# EAGLE board light-switch (EAGLE 9.2.2)
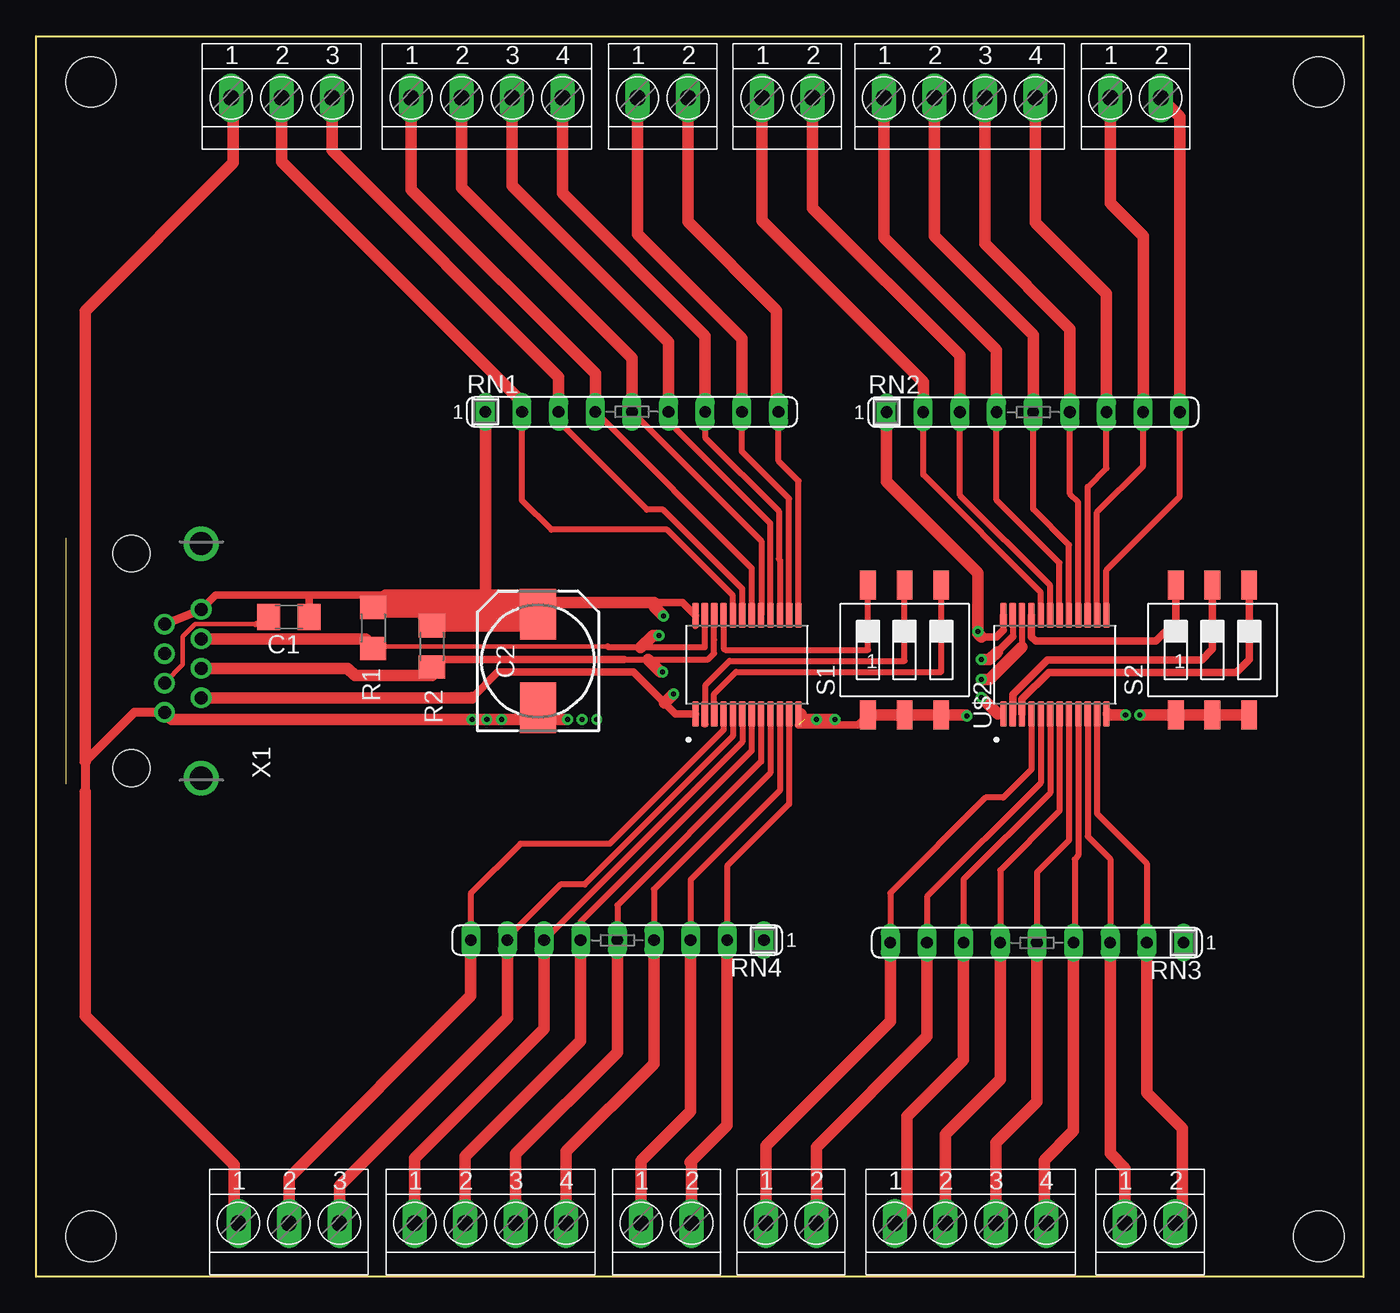
[diagram p0: board, top side]
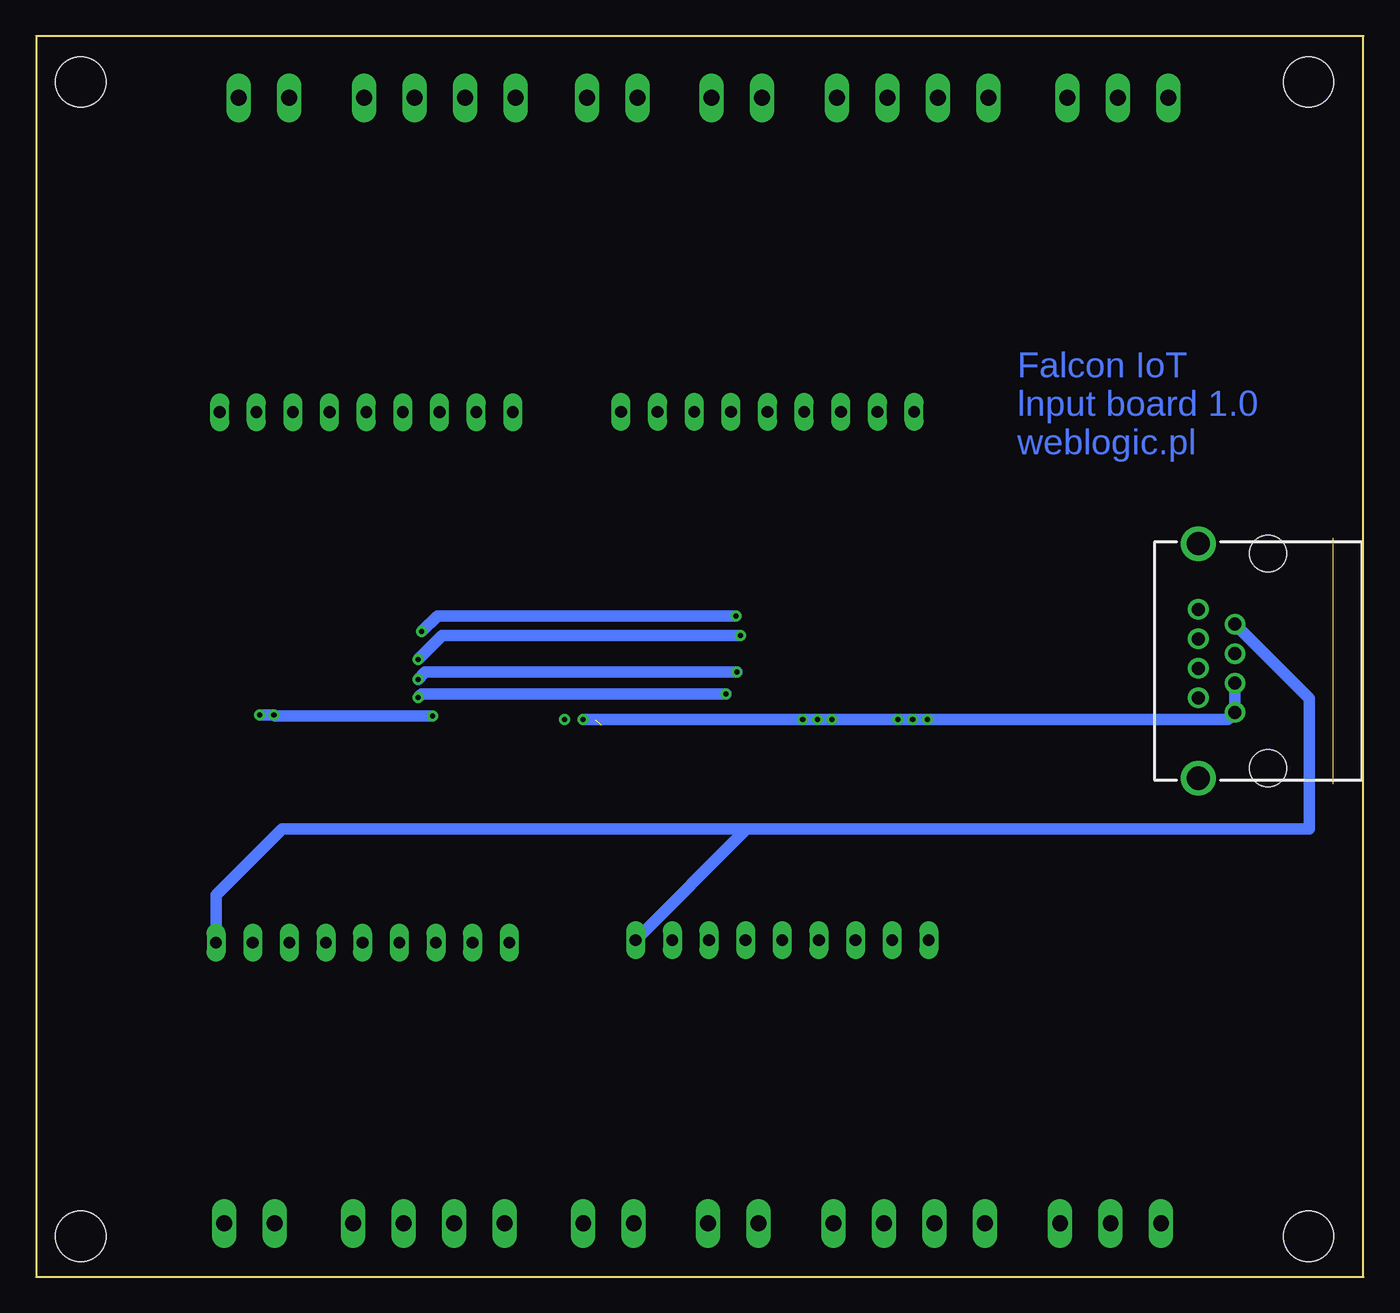
[diagram p1: board, bottom side, seen from below]

Size 92 x 86 mm. Coordinates in mm from the lower left corner, seen from the top.
Outline: 0,0 0,86 92,86 92,0 0,0
Copper layers (1*16): Top 0.035mm / dielectric 1.5mm / Bottom 0.035mm
Design rules "default": minimum track width 6mil, minimum drill 0.35mm, track to track 6mil, track to pad 6mil, pad to pad 6mil, via to via 6mil, smd to smd 6mil, copper to edge 40mil, drill to drill 6mil, minimum pad ring 10mil, minimum via ring 8mil, stop-mask expansion 4mil, vias tented up to drill 0mil, thermal gap 10mil
Holes 3.48 mm at 3.81,82.82 88.9,82.82 88.9,2.81 3.81,2.81

## Footprints (pad centres in the part's own frame; a part is rotated, then mirrored left to right if it is on the bottom)
C1206 = smd 1.6 x 1.8: 1 -1.4,0; 2 1.4,0
150CLZ-0810 = smd 3.5 x 2.5: + 3.25,0; - -3.25,0
R1206 = smd 1.6 x 1.803: 1 -1.422,0; 2 1.422,0
SIL9 = drill 0.813 long: 1 -10.16,0; 2 -7.62,0; 3 -5.08,0; 4 -2.54,0; 5 0,0; 6 2.54,0; 7 5.08,0; 8 7.62,0; 9 10.16,0
SMS-003 = smd 1.092 x 2.007: 1 -2.54,-4.496; 2 0,-4.496; 3 2.54,-4.496; 4 2.54,4.496; 5 0,4.496; 6 -2.54,4.496
SOP65P775X200-24N = smd 1.78 x 0.48: 1 -3.42,3.575; 2 -3.42,2.925; 3 -3.42,2.275; 4 -3.42,1.625; 5 -3.42,0.975; 6 -3.42,0.325; 7 -3.42,-0.325; 8 -3.42,-0.975; 9 -3.42,-1.625; 10 -3.42,-2.275; 11 -3.42,-2.925; 12 -3.42,-3.575; 13 3.42,-3.575; 14 3.42,-2.925; 15 3.42,-2.275; 16 3.42,-1.625; 17 3.42,-0.975; 18 3.42,-0.325; 19 3.42,0.325; 20 3.42,0.975; 21 3.42,1.625; 22 3.42,2.275; 23 3.42,2.925; 24 3.42,3.575
GLX-S-88M = drill 0.9 pad 1.422: 1 -3.57,-2.3; 2 -2.55,-4.84; 3 -1.53,-2.3; 4 -0.51,-4.84; 5 0.51,-2.3; 6 1.53,-4.84; 7 2.55,-2.3; 8 3.57,-4.84 | drill 1.6 pad 2.184: S1 -8.125,-4.84; S2 8.125,-4.84 | hole 2.55: -7.44,0; 7.44,0
TERMINAL-BLOCK-3-PIN-3.5MM-LONG-PAD = drill 1.1 pad 1.7 long: 1 -3.5,-0.1; 2 0,-0.1; 3 3.5,-0.1
TERMINAL-BLOCK-4-PIN-3.5MM-LONG-PAD = drill 1.1 pad 1.7 long: 1 -5.25,-0.1; 2 -1.75,-0.1; 3 1.75,-0.1; 4 5.25,-0.1
TERMINAL-BLOCK-2-PIN-3.5MM-LONG-PAD = drill 1.1 pad 1.7 long: 1 -1.75,-0.1; 2 1.75,-0.1

## Placement (x,y rotation side)
C1  [C1206]  17.53,45.74 0 top
C2  [150CLZ-0810]  34.8,42.69 90 top
R1  [R1206]  23.37,44.97 90 top
R2  [R1206]  27.43,43.7 90 top
RN1  [SIL9]  41.3,59.96 0 top
RN2  [SIL9]  69.11,59.93 0 top
RN3  [SIL9]  69.37,23.16 180 top
RN4  [SIL9]  40.28,23.33 180 top
S1  SWS003  [SMS-003]  60.2,43.45 0 top
S2  SWS003  [SMS-003]  81.53,43.45 0 top
U$1  PCF8575CSSOP24  [SOP65P775X200-24N]  49.28,42.43 90 top
U$2  PCF8575CSSOP24  [SOP65P775X200-24N]  70.61,42.43 90 top
X1  GLX-S-88M  [GLX-S-88M]  6.6,42.69 90 top
X2  TERMINAL-BLOCK-3.5MM-3-PIN-LONG-PAD  [TERMINAL-BLOCK-3-PIN-3.5MM-LONG-PAD]  17.53,3.81 0 top
X3  TERMINAL-BLOCK-3.5MM-3-PIN-LONG-PAD  [TERMINAL-BLOCK-3-PIN-3.5MM-LONG-PAD]  17.02,81.82 0 top
X4  TERMINAL-BLOCK-3.5MM-4-PIN-LONG-PAD  [TERMINAL-BLOCK-4-PIN-3.5MM-LONG-PAD]  31.24,81.82 0 top
X5  TERMINAL-BLOCK-3.5MM-2-PIN-LONG-PAD  [TERMINAL-BLOCK-2-PIN-3.5MM-LONG-PAD]  43.43,81.82 0 top
X6  TERMINAL-BLOCK-3.5MM-4-PIN-LONG-PAD  [TERMINAL-BLOCK-4-PIN-3.5MM-LONG-PAD]  31.5,3.81 0 top
X7  TERMINAL-BLOCK-3.5MM-2-PIN-LONG-PAD  [TERMINAL-BLOCK-2-PIN-3.5MM-LONG-PAD]  43.69,3.81 0 top
X8  TERMINAL-BLOCK-3.5MM-2-PIN-LONG-PAD  [TERMINAL-BLOCK-2-PIN-3.5MM-LONG-PAD]  52.07,81.82 0 top
X9  TERMINAL-BLOCK-3.5MM-2-PIN-LONG-PAD  [TERMINAL-BLOCK-2-PIN-3.5MM-LONG-PAD]  52.32,3.81 0 top
X10  TERMINAL-BLOCK-3.5MM-4-PIN-LONG-PAD  [TERMINAL-BLOCK-4-PIN-3.5MM-LONG-PAD]  64.01,81.82 0 top
X11  TERMINAL-BLOCK-3.5MM-4-PIN-LONG-PAD  [TERMINAL-BLOCK-4-PIN-3.5MM-LONG-PAD]  64.77,3.81 0 top
X12  TERMINAL-BLOCK-3.5MM-2-PIN-LONG-PAD  [TERMINAL-BLOCK-2-PIN-3.5MM-LONG-PAD]  76.2,81.82 0 top
X13  TERMINAL-BLOCK-3.5MM-2-PIN-LONG-PAD  [TERMINAL-BLOCK-2-PIN-3.5MM-LONG-PAD]  77.22,3.81 0 top

## Library data of the parts
C1 = eagle-ltspice; SPICEMODEL: NONE; SPICEPREFIX: C
C2 = rcl; SPICEPREFIX: C
R1 R2 = eagle-ltspice; SPICEMODEL: NONE; SPICEPREFIX: R
RN1-RN4 = resistor-sil; OC_FARNELL: unknown; OC_NEWARK: unknown
S1 S2 = smd-special
U$1 U$2 = pcf8575c
X1 = con-kycon; OC_FARNELL: unknown; OC_NEWARK: unknown
X2-X13 = Rembrandt Electronics - Terminal Block 3-5mm v1-0

## Nets
GND: C1.1 C2.- S1.1 S1.2 S1.3 S2.1 S2.2 S2.3 U$1.12 U$2.12 X1.1 X1.3 X2.1 X3.1
INT: U$1.1 U$2.1 X1.2
N$1: RN1.2 U$1.20 X3.2
N$3: RN1.3 U$1.19 X3.3
N$4: RN1.4 U$1.18 X4.1
N$5: RN1.5 U$1.17 X4.2
N$6: RN1.6 U$1.16 X4.3
N$7: RN1.7 U$1.15 X4.4
N$8: RN1.8 U$1.14 X5.1
N$9: RN1.9 U$1.13 X5.2
N$10: RN4.9 U$1.4 X2.2
N$11: RN4.8 U$1.5 X2.3
N$12: RN4.7 U$1.6 X6.1
N$13: RN4.6 U$1.7 X6.2
N$14: RN4.5 U$1.8 X6.3
N$15: RN4.4 U$1.9 X6.4
N$16: RN4.3 U$1.10 X7.1
N$17: RN4.2 U$1.11 X7.2
N$19: RN3.9 U$2.4 X9.1
N$20: S1.4 U$1.3
N$26: S2.5 U$2.2
N$27: S1.6 U$1.21
N$28: S1.5 U$1.2
N$29: S2.4 U$2.3
N$30: RN2.2 U$2.20 X8.1
N$31: RN2.3 U$2.19 X8.2
N$32: RN2.4 U$2.18 X10.1
N$33: RN2.5 U$2.17 X10.2
N$34: RN2.6 U$2.16 X10.3
N$35: RN2.7 U$2.15 X10.4
N$36: RN2.8 U$2.14 X12.1
N$37: RN2.9 U$2.13 X12.2
N$39: RN3.8 U$2.5 X9.2
N$40: RN3.7 U$2.6 X11.1
N$41: RN3.6 U$2.7 X11.2
N$42: RN3.5 U$2.8 X11.3
N$43: RN3.4 U$2.9 X11.4
N$44: RN3.3 U$2.10 X13.1
N$45: RN3.2 U$2.11 X13.2
N$46: S2.6 U$2.21
SCL: R2.1 U$1.22 U$2.22 X1.4
SDA: R1.1 U$1.23 U$2.23 X1.6
VDD: C1.2 C2.+ R1.2 R2.2 RN1.1 RN2.1 RN3.1 RN4.1 U$1.24 U$2.24 X1.7 X1.8

## Tracks (layer width: path | path; a pad name or v marks a point on that pad's centre or on a via)
GND  (via drill 0.35)  (1 unrouted)
  Top 0.305: S1.2 S1.3 | X1.3 10.17,42.43 10.17,44.38 11.02,45.23 15.21,45.23 15.52,45.23 16.15,45.86
  Top 0.406: U$2.12 74.25,38.95 v75.51,38.95 | 53.24,38.62 v55.37,38.62 | C1.1 15.62,45.23 15.21,45.23 | U$1.12 53,38.87
  Top 0.508: 57.33,38.62 S1.1 56.96,38.25 52.85,38.25
  Top 0.61: 3.4,33.61 3.4,35.72 6.8,39.12 X1.1
  Top 0.813: S1.1 S1.3 64.44,38.95 v64.52,38.88 | X1.1 9.4,38.62 v30.23,38.62 v31.24,38.62 v32.26,38.62 34.8,38.62 | 34.8,38.62 C2.- | 53,39.01 53,38.87 53.24,38.62 v54.1,38.62 v55.37,38.62 | v36.83,38.62 34.8,38.62 | S2.3 S2.2 S2.1 v76.5,38.95 | v75.51,38.95 74.4,38.95 74.34,39.01 | 3.4,33.61 3.4,18.07 13.72,7.76 13.72,4.02 X2.1 | 3.4,35.72 3.4,66.95 13.66,77.21 13.66,81.57 X3.1
  Bottom 0.813: X1.3 X1.1 9.4,38.62 v30.23,38.62 v31.24,38.62 v32.26,38.62 v36.83,38.62 v37.85,38.62 v38.86,38.62 v54.1,38.62 | v64.52,38.88 75.44,38.88 v75.51,38.95 v76.5,38.95
INT  (via drill 0.35)
  Top 0.406: U$2.1 66.67,39.01
  Top 0.508: 30.22,40.14 32,41.93 41.4,41.93 43.56,39.77 44.31,39.01 U$1.1
  Top 0.813: X1.2 30.22,40.14 30.23,40.15 | 43.56,39.77 v44.2,40.4 | 66.67,39.01 v65.53,40.15
  Bottom 0.813: v44.2,40.4 65.28,40.4 v65.53,40.15
N$1
  Top 0.406: U$1.20 48.3,47.22 43.74,51.78 35.71,51.78 33.68,53.81 RN1.2
  Top 0.813: RN1.2 33.68,60.62 17.02,77.28 X3.2
N$3
  Top 0.406: U$1.19 48.95,47.69 43.46,53.18 42.34,53.18 36.22,59.3 RN1.3
  Top 0.813: X3.3 20.52,78.08 36.22,62.37 RN1.3
N$4
  Top 0.406: RN1.4 49.6,49.12 U$1.18
  Top 0.813: RN1.4 38.76,62.6 25.99,75.37 X4.1
N$5
  Top 0.406: U$1.17 50.27,45.87 50.27,50.99 RN1.5
  Top 0.813: X4.2 29.49,75.48 41.3,63.67 RN1.5
N$6
  Top 0.406: RN1.6 43.84,59.27 50.9,52.21 U$1.16
  Top 0.813: X4.3 32.99,75.63 43.84,64.79 RN1.6
N$7
  Top 0.406: U$1.15 51.55,49.71 51.49,49.77 51.49,53.08 46.38,58.18 RN1.7
  Top 0.813: X4.4 36.49,75.11 46.38,65.22 RN1.7
N$8
  Top 0.406: 41.78,81.62 X5.1 | U$1.14 52.2,53.94 48.92,57.22 RN1.8
  Top 0.813: X5.1 41.68,72.28 48.92,65.04 RN1.8
N$9
  Top 0.406: U$1.13 52.85,55.17 51.46,56.56 RN1.9
  Top 0.813: X5.2 45.18,73.12 51.33,66.97 51.33,60.09 RN1.9
N$10
  Top 0.406: U$1.4 47.65,37.91 39.75,30.01 33.58,30.01 30.12,26.56 RN4.9
  Top 0.813: RN4.9 30.12,19.47 17.53,6.87 X2.2
N$11
  Top 0.406: U$1.5 48.3,37.47 38.02,27.19 36.35,27.19 32.66,23.51 RN4.8
  Top 0.813: RN4.8 32.66,17.95 21.03,6.31 X2.3
N$12
  Top 0.406: U$1.6 48.95,37.08 RN4.7
  Top 0.813: RN4.7 35.2,17.19 26.25,8.23 X6.1
N$13
  Top 0.406: U$1.7 49.6,36.46 37.74,24.6 RN4.6
  Top 0.813: RN4.6 37.74,16.35 29.75,8.35 X6.2
N$14
  Top 0.406: U$1.8 50.25,35.71 40.28,25.75 RN4.5
  Top 0.813: RN4.5 40.28,15.56 33.25,8.52 X6.3
N$15
  Top 0.406: U$1.9 50.9,34.94 42.82,26.86 RN4.4
  Top 0.813: RN4.4 42.82,14.77 36.75,8.7 X6.4
N$16
  Top 0.406: U$1.10 51.55,33.71 45.36,27.52 RN4.3
  Top 0.813: RN4.3 45.36,11.47 41.94,8.04 X7.1
N$17
  Top 0.406: U$1.11 52.2,32.76 47.9,28.46 RN4.2
  Top 0.813: RN4.2 47.9,10.51 45.34,7.94 45.44,7.84 X7.2
N$19
  Top 0.406: U$2.4 68.99,35.17 67.03,33.21 65.81,33.21 59.21,26.61 RN3.9
  Top 0.813: RN3.9 59.21,17.72 50.57,9.09 X9.1
N$20
  Top 0.406: U$1.3 47,40.41 48.51,41.93 62.74,41.93 S1.4
N$26
  Top 0.508: U$2.2 67.69,40.37 70.08,42.76 80.8,42.76 81.53,43.5 S2.5
N$27
  Top 0.406: U$1.21 47.65,43.55 47.75,43.45 57.66,43.45 S1.6
N$28
  Top 0.406: 46.35,38.25 46.41,38.31 46.41,41.03 48.06,42.69 60.2,42.69 S1.5
N$29
  Top 0.508: U$2.3 68.34,40.04 70.2,41.9 83.19,41.9 84.07,42.79 S2.4
N$30
  Top 0.406: U$2.20 69.64,47.45 61.49,55.59 RN2.2
  Top 0.813: RN2.2 61.49,62.02 50.32,73.19 X8.1
N$31
  Top 0.406: U$2.19 70.29,47.91 64.03,54.17 RN2.3
  Top 0.813: X8.2 53.82,74.08 64.03,63.87 RN2.3
N$32
  Top 0.406: U$2.18 70.94,49.48 66.57,53.84 RN2.4
  Top 0.813: RN2.4 66.57,64.23 58.76,72.04 X10.1
N$33
  Top 0.406: U$2.17 71.59,50.73 69.11,53.2 RN2.5
  Top 0.813: X10.2 62.26,72.12 69.11,65.27 RN2.5
N$34
  Top 0.406: U$2.16 72.24,53.69 71.65,54.27 RN2.6
  Top 0.813: RN2.6 71.65,65.7 65.76,71.6 X10.3
N$35
  Top 0.406: U$2.15 72.89,54.74 74.19,56.05 RN2.7
  Top 0.813: X10.4 69.26,73.07 74.19,68.14 RN2.7
N$36
  Top 0.406: U$2.14 73.54,53 76.73,56.2 RN2.8
  Top 0.813: RN2.8 76.73,72.13 74.45,74.41 X12.1
N$37
  Top 0.406: U$2.13 74.19,48.98 79.27,54.07 RN2.9
  Top 0.813: X12.2 79.27,80.4 RN2.9
N$39
  Top 0.406: U$2.5 69.64,34.24 61.75,26.36 RN3.8
  Top 0.813: RN3.8 61.75,16.65 54.07,8.98 X9.2
N$40
  Top 0.406: U$2.6 70.29,33.55 64.29,27.55 RN3.7
  Top 0.813: RN3.7 64.29,15.03 60.38,11.12 60.38,4.57 X11.1
N$41
  Top 0.406: U$2.7 70.94,32.29 66.83,28.18 RN3.6
  Top 0.813: RN3.6 66.83,13.68 63.02,9.87 X11.2
N$42
  Top 0.406: U$2.8 71.59,30.25 69.37,28.03 RN3.5
  Top 0.813: RN3.5 69.37,12.13 66.52,9.29 X11.3
N$43
  Top 0.406: U$2.9 72.24,29.2 71.98,28.95 71.98,23.23 RN3.4
  Top 0.813: RN3.4 71.91,10.12 69.88,8.09 69.88,3.86 X11.4
N$44
  Top 0.406: U$2.10 72.89,30.53 74.45,28.97 RN3.3
  Top 0.813: RN3.3 74.45,8.55 75.47,7.53 X13.1
N$45
  Top 0.406: U$2.11 73.54,32.12 76.99,28.67 RN3.2
  Top 0.813: RN3.2 76.99,12.77 79.45,10.3 79.45,4.2 X13.2
N$46
  Top 0.508: U$2.21 68.99,44.36 69.29,44.06 77.62,44.06 78.99,45.43 S2.6
SCL  (via drill 0.35)
  Top 0.406: 40.74,42.79 42.42,42.79 46.58,42.79 47,43.21 47,44.16 47,45.09 U$1.22 | U$2.22 68.34,43.66
  Top 0.508: 40.74,42.79 27.94,42.79 R2.1
  Top 0.813: X1.4 21.59,42.18 22.1,41.67 27.43,41.67 R2.1 | 42.42,42.79 43.28,41.93 v43.43,41.93 | 68.34,43.66 66.09,41.42 v65.53,41.42
  Bottom 0.813: v43.43,41.93 65.02,41.93 v65.53,41.42
SDA  (via drill 0.35)
  Top 0.305: R1.1 23.52,43.7 39.62,43.7
  Top 0.406: 39.62,43.7 39.7,43.63 41.91,43.63 46.35,43.63 46.35,44.36 46.35,45.09 U$1.23 | U$2.23 67.69,44.39
  Top 0.508: 67.69,44.39 66.62,43.32
  Top 0.813: X1.6 22.85,44.22 23.37,43.7 R1.1 | 41.91,43.63 42.75,44.47 v43.18,44.47 | 66.62,43.32 66.09,42.79 v65.53,42.79
  Bottom 0.813: v43.18,44.47 63.86,44.47 v65.53,42.79
VDD  (via drill 0.35)
  Top 0.406: 22.76,46.4 R1.2 | 25.91,46.4 26.16,46.4 | 26.87,45.69 26.49,46.07 26.16,46.4 | 26.16,46.4 25.91,46.65 27.33,46.65 27.56,46.88 27.94,47.26 33.27,47.26 33.53,47.26 34.8,47.26 | 45.7,45.09 45.72,45.11 45.72,46.4 45.7,46.38 U$1.24 | 35.46,46.4 35.02,45.96 C2.+ | U$2.24 67.04,44.83
  Top 0.508: X1.8 12.45,47.26 18.8,47.26 | 18.8,47.26 24.23,47.26 | 25.91,46.4 25.91,46.65 | 27.56,46.88 24,46.88 23.93,46.95 | C1.2 18.93,47.13 18.8,47.26 | U$2.24 67.04,45.21 | 67.04,44.83 66.55,44.34 65.53,44.34 | U$1.24 44.8,46.75 42.82,46.75
  Top 0.61: X1.7 X1.8
  Top 0.813: C2.+ 34.39,46.85 33.95,46.41 | 33.95,46.41 33.53,46.84 33.53,47.26 | 33.27,47.26 24.23,47.26 23.93,46.95 R1.2 | R2.2 33.88,45.13 | 33.88,45.13 34.04,44.97 | 33.88,45.13 33.33,45.69 26.87,45.69 | 26.92,46.07 26.49,46.07 23.7,46.07 R1.2 | 26.92,46.07 30.73,46.07 | 30.73,46.07 33.6,46.07 33.95,46.41 | C2.+ 34.46,46.65 27.33,46.65 | R1.2 25.91,46.4 26.59,46.4 26.92,46.07 | C2.+ 35.61,46.75 42.82,46.75 42.82,46.47 v43.48,45.81 | 65.53,44.34 65.28,44.59 v65.28,44.72 65.28,48.78 58.95,55.11 RN2.1 | RN1.1 31.14,46.47 30.73,46.07
  Top 1.016: 23.01,46.75 R1.2
  Bottom 0.813: v43.48,45.81 64.19,45.81 v65.28,44.72 | X1.7 3.76,40.09 3.76,31.03 42.75,31.03 | 42.75,31.03 RN4.1 | 42.75,31.03 74.95,31.03 79.53,26.46 RN3.1

## Text on the board
Bottom: Falcon IoT / lnput board 1.0 / weblogic.pl